# Altium PCB PowerBlock.PcbDoc
Units mm, origin at the board's own origin, x right, y up, seen from the top; angles counter-clockwise.
Board outline 35 x 25 mm, 2 copper layers (Top Layer, Bottom Layer); 19 components, 9 nets, 63 pads, 13 vias.
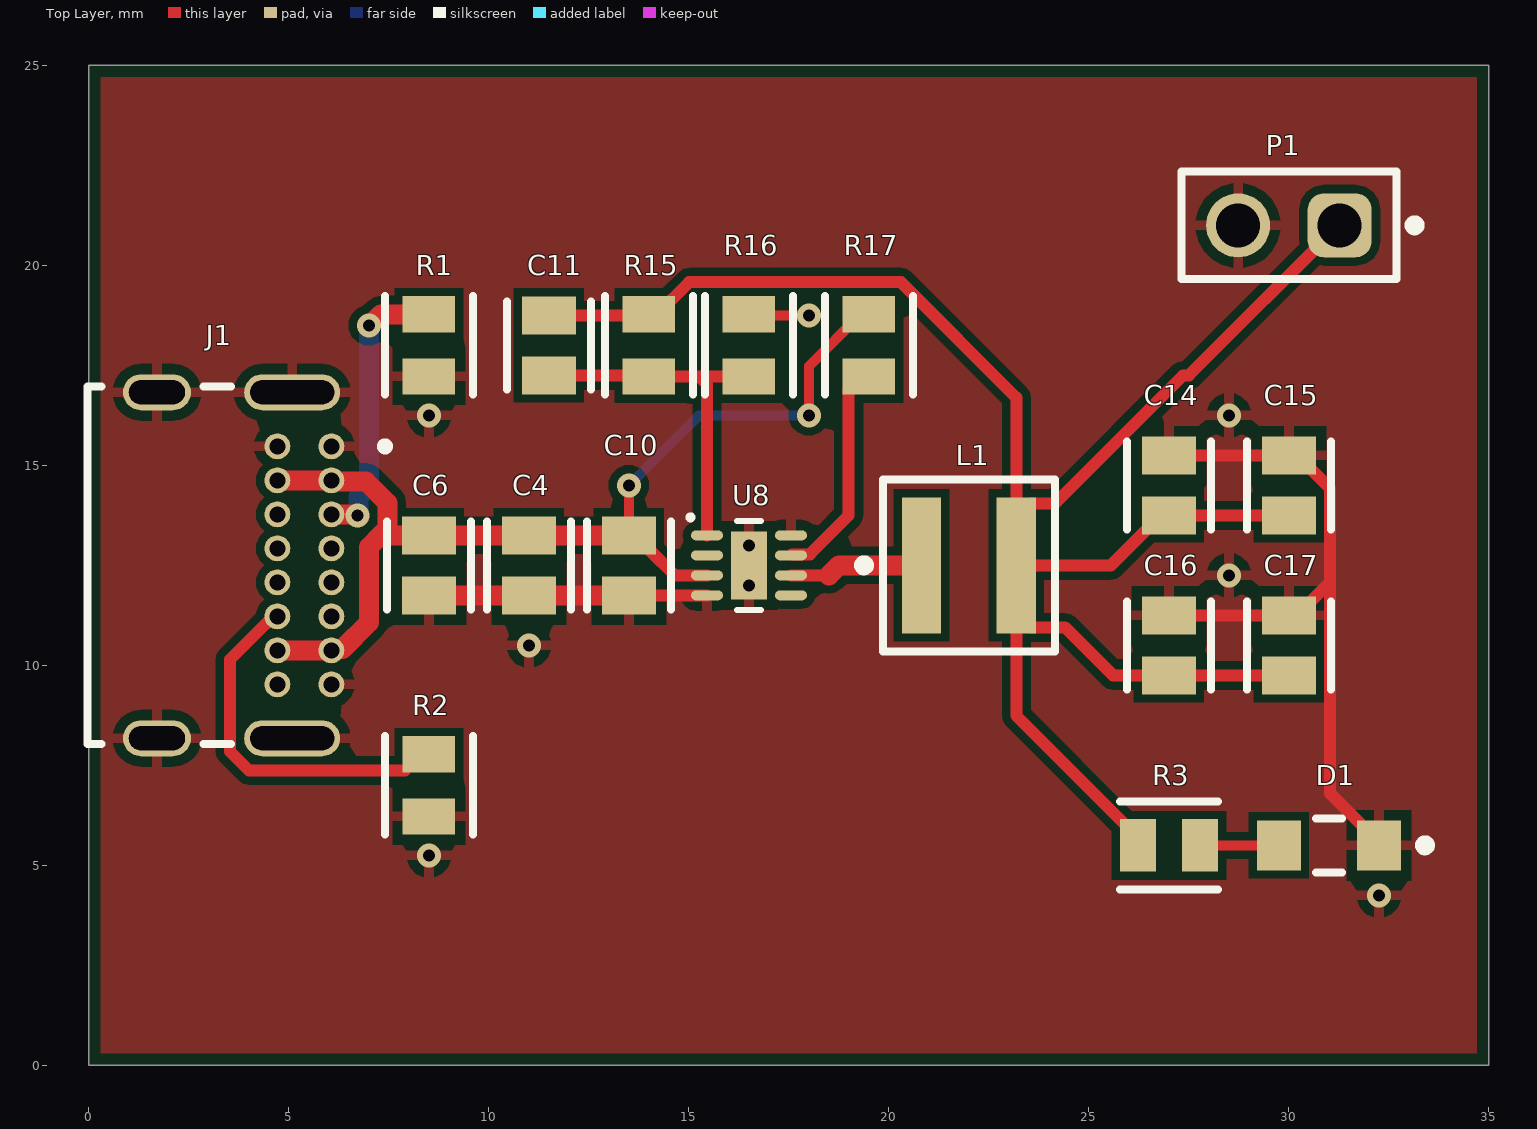
[diagram p0: Top Layer view]
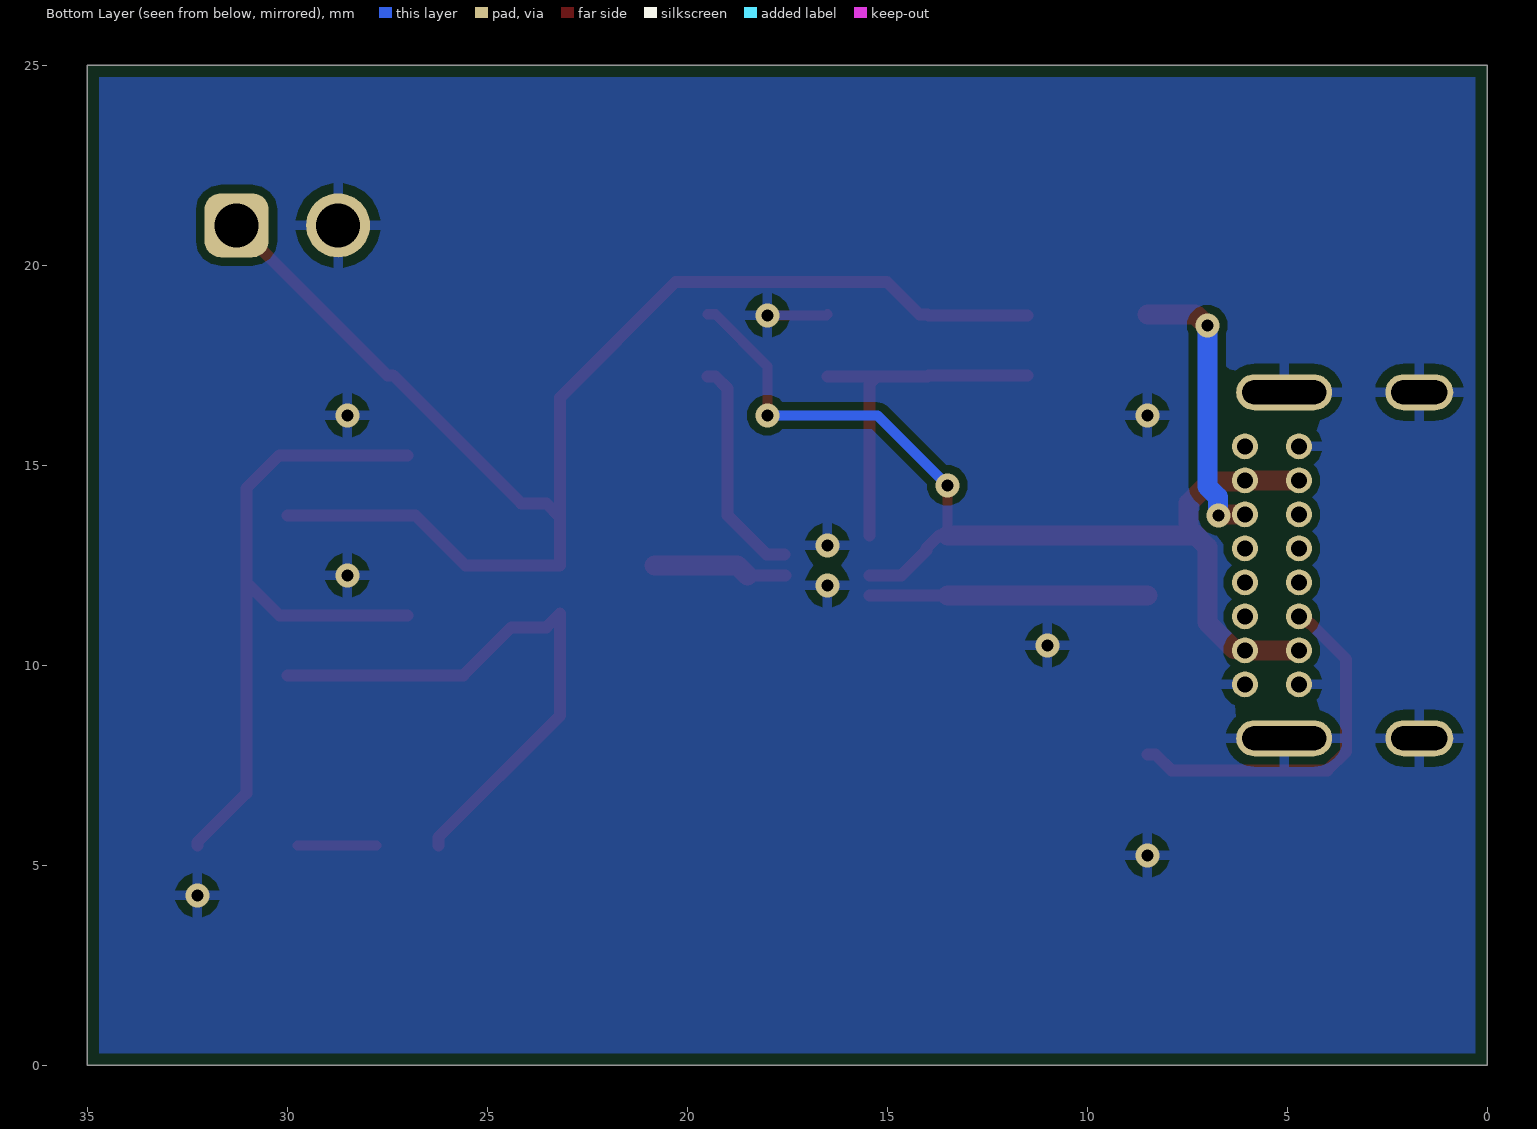
[diagram p1: Bottom Layer view, seen from below]
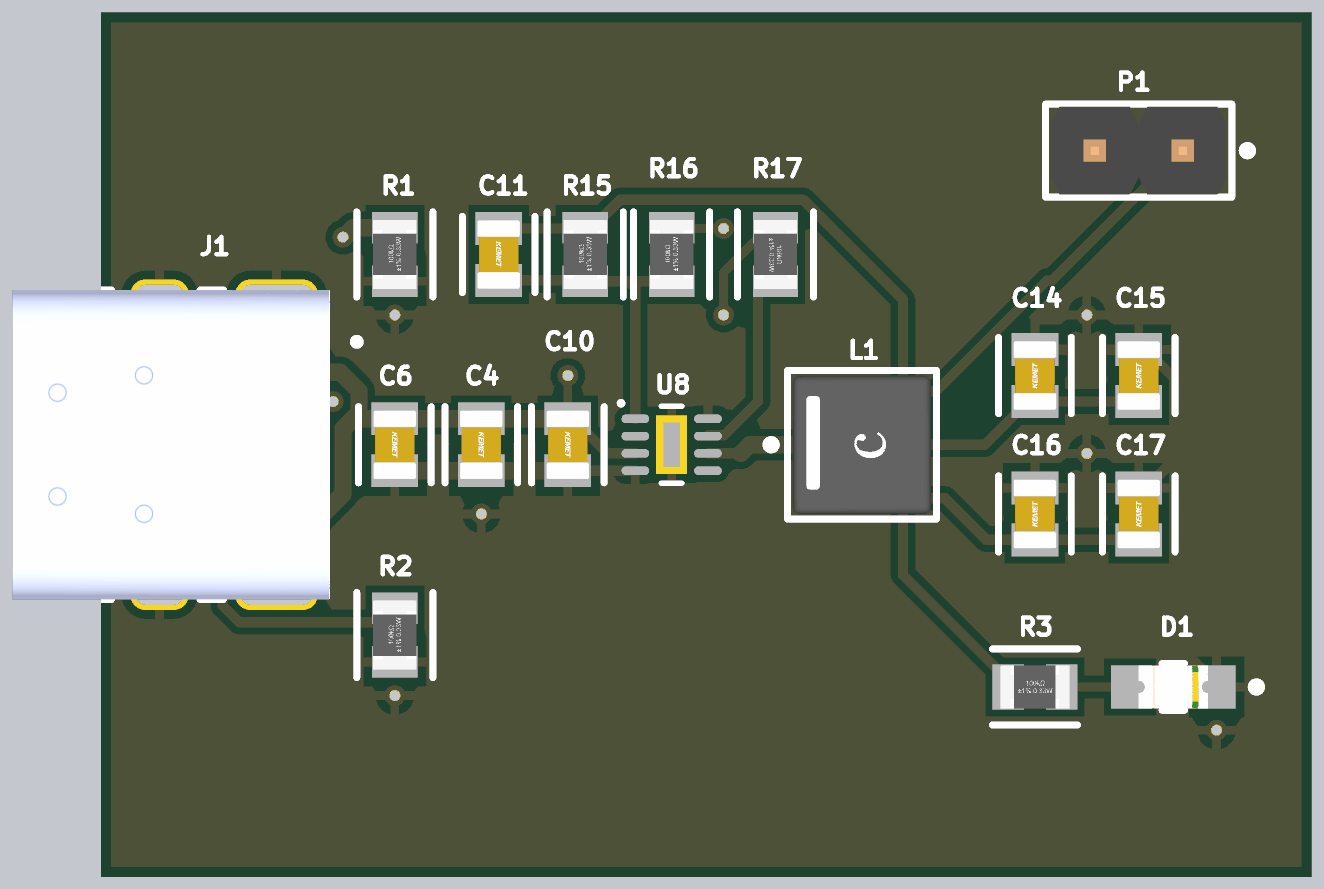
[diagram p2: 3D render of the assembled board from above, using the file's embedded part models]

## Layer stack, top to bottom
Top Solder: solder mask 0.0102, Solder Resist, Dk 3.5
Top Layer: signal copper 0.0356
Dielectric 1: dielectric 0.32, FR-4, Dk 4.8
Bottom Layer: signal copper 0.0356
Bottom Solder: solder mask 0.0102, Solder Resist, Dk 3.5

## Board outline
0,0 35,0 35,25 0,25

## Design rules (kind name [scope] priority, off if disabled: settings)
BoardOutlineClearance [All] p1: gap=0.254 ignorepadtopadclearanceinfootprint=FALSE except(0: Arc-SplitContinuation Track-OutlineEdge Track-CavityEdge Track-CutoutEdge Track-SplitBarrior Track-SplitContinuation SMDPad-SplitContinuation THPad-SplitContinuation Via-SplitContinuation Fill-SplitContinuation Poly-SplitContinuation Region-SplitContinuation Text-OutlineEdge Text-CavityEdge Text-CutoutEdge Text-SplitBarrior Text-SplitContinuation)
Clearance [All] p1: gap=0.2 ignorepadtopadclearanceinfootprint=FALSE
MinimumSolderMaskSliver [All] p1: minsoldermaskwidth=0.1
PolygonConnect [All] p1: connectstyle=Relief reliefconductorwidth=0.254 reliefentries=4 polygonreliefangle="90 Angle" airgapwidth=0.254
RoutingVias [All] p1: holewidth=0.3 width=0.6 viastyle="Through Hole" minholewidth=0.3 minwidth=0.6 maxholewidth=0.3 maxwidth=0.6
SilkToSilkClearance [All] p1: silktosilkclearance=0.15
SilkToSolderMaskClearance [IsPad] p1: minsilkscreentomaskgap=0.15 clearancetoexposedcopper=TRUE
SolderMaskExpansion [All] p1: expansion=0 istentingtop=FALSE
SupplyNets "Schematic Supply Nets_2" [InNet('3V3')] p1: voltage=0.000
SupplyNets "Schematic Supply Nets_1" [InNet('5V')] p2: voltage=0.000
SupplyNets "Schematic Supply Nets" [InNet('GND')] p3: voltage=0.000
Width [All] p1: maxlimit=2 minlimit=0.254 preferedwidth=0.3
27 further rules are at their usual default settings.

## Components (designator, comment, footprint, x,y, rotation, side; value= is the part's Value field where it differs from the comment)
C4 "10uF" FP-C0805C106K3PACTU-MFG 11,12.5 r270 top
C6 "10uF" FP-C0805C106K3PACTU-MFG 8.5,12.5 r270 top
C10 "100nF" FP-C0805C106K3PACTU-MFG 13.5,12.5 r270 top
C11 "470 pF" FP-C0805C106K3PACTU-MFG 11.5,18 r270 top
C14 "10uF" FP-C0805C106K3PACTU-MFG 27,14.5 r90 top
C15 "10uF" FP-C0805C106K3PACTU-MFG 30,14.5 r90 top
C16 "10uF" FP-C0805C106K3PACTU-MFG 27,10.5 r90 top
C17 "10uF" FP-C0805C106K3PACTU-MFG 30,10.5 r90 top
D1 "LED Green" FP-LTST-C171KGKT-MFG 31,5.5 r180 top
J1 "USB-C" GCT_USB4085-GF-A_REVA4 1.7,12.5 r270 top
L1 "2.2uH" FP-XAL4020-MFG 22,12.5 r0 top
P1 "61300211121" 61300211121 30,21 r180 top
R1 "5.1k" FP-CRGP0805-IPC_C 8.5,18 r90 top value=10KΩ
R2 "5.1k" FP-CRGP0805-IPC_C 8.5,7 r90 top value=10KΩ
R3 "330" FP-CRGP0805-IPC_C 27,5.5 r0 top value=10KΩ
R15 "10k" FP-CRGP0805-IPC_C 14,18 r90 top value=10KΩ
R16 "2.2k" FP-CRGP0805-IPC_C 16.5,18 r90 top value=10KΩ
R17 "100k" FP-CRGP0805-IPC_C 19.5,18 r270 top value=10KΩ
U8 "AP3441" SON50P201X201X60-9M 16.5,12.5 r0 top

## Footprints (in the part's own frame and the unit in brackets; to place one, negate y for a bottom-side part, rotate by r counter-clockwise, add the part's x,y. Pads: shape width x height; smd on the part's side, far side on the other; paste and mask are expansions set on the pad)
61300211121 [mm] "Pin Header, pitch 2.54 mm, THT, Vertical, single row, 2p"
  rrect50% 1.6x1.6 hole 1.1: 1(-1.27,0)
  round 1.6 hole 1.1: 2(1.27,0)
  silkscreen extent -3.26,-1.35 2.69,1.35, body extent -2.54,-1.27 2.54,1.27, height 8.57
FP-C0805C106K3PACTU-MFG [mm]
  rect 0.95x1.35 smd paste+0 mask+0: 1(-0.75,0) 2(0.75,0)
  silkscreen extent -1.1,-1.05 1.1,1.05, body extent -1.4,-0.85 1.4,0.85, height 0.25
FP-CRGP0805-IPC_C [mm]
  rect 0.906x1.31 smd paste+0 mask+0: 1(-0.776,0) 2(0.776,0)
  silkscreen extent -1.23,-1.1 1.23,1.1, body extent -1.33,-0.8 1.33,0.8, height 0.25
FP-LTST-C171KGKT-MFG [mm]
  rect 1.1x1.25 smd paste+0 mask+0: 1(-1.25,0) 2(1.25,0)
  silkscreen extent -2.53,-0.67 0.33,0.67, body extent -1.9,-0.77 1.9,0.77, height 0.25
FP-XAL4020-MFG [mm]
  rect 0.98x3.4 smd paste+0 mask+0: 1(-1.185,0) 2(1.185,0)
  silkscreen extent -2.75,-2.15 2.15,2.15, body extent -2.25,-2.25 2.25,2.25, height 0.25
GCT_USB4085-GF-A_REVA4 [mm]
  round 0.65 hole 0.4: A1(-2.975,4.36) A4(-2.125,4.36) A5(-1.275,4.36) A6(-0.425,4.36) A7(0.425,4.36) A8(1.275,4.36) A9(2.125,4.36) A12(2.975,4.36) B1(2.975,3.01) B4(2.125,3.01) B5(1.275,3.01) B6(0.425,3.01) B7(-0.425,3.01) B8(-1.275,3.01) B9(-2.125,3.01) B12(-2.975,3.01)
  oval 0.9x1.7 hole 0.6 slot 1.4 at 90 deg: S1(-4.325,0) S2(4.325,0)
  oval 0.9x2.4 hole 0.6 slot 2.1 at 90 deg: S3(-4.325,3.38) S4(4.325,3.38)
  silkscreen extent -4.47,-1.74 4.47,5.8, body extent -4.47,-4.25 4.47,4.92, height 3.46
SON50P201X201X60-9M [mm] "SON, 8-Leads, Body 2.01x2.01mm, Pitch 0.50mm, Thermal Pad 1.70x0.90mm, IPC Low Density"
  oval 0.8x0.25 smd: 1(-1.05,0.75) 2(-1.05,0.25) 3(-1.05,-0.25) 4(-1.05,-0.75) 5(1.05,-0.75) 6(1.05,-0.25) 7(1.05,0.25) 8(1.05,0.75)
  rect 0.9x1.7 smd paste-0.211: 9(0,0)
  silkscreen extent -1.52,-1.11 0.3,1.26, body extent -1.01,-1.01 1.01,1.01, height 0.6

## Part data
C4 C6 C14 C15 C16 C17: library part CMP-03020-034663-1, "CAP CER 10UF 25V X5R 0805", Case Code (Imperial)=0805, Case Code (Metric)=2012, Dielectric=X5R, Dielectric Material=Ceramic, Max Operating Temperature=85°C, Min Operating Temperature=-55°C, Tolerance=10%, Voltage=25V, Capacitance=10uF, Case/Package=0805, Depth=1.25mm, Dissipation Factor=10%, Height=1.25mm, Lead Free="Lead Free", Length=0.079inch, Mount="Surface Mount", Packaging="Cut Tape", REACH SVHC="No SVHC", RoHS Compliant=Yes, Termination=Solder, Thickness=0.057inch, Voltage Rating=25V, Voltage Rating (DC)=25V, Width=0.049inch
C10 C11: library part CMP-03020-034663-1, "CAP CER 10UF 25V X5R 0805", Capacitance=10uF, Case Code (Imperial)=0805, Case Code (Metric)=2012, Dielectric=X5R, Dielectric Material=Ceramic, Max Operating Temperature=85°C, Min Operating Temperature=-55°C, Tolerance=10%, Voltage=25V, Case/Package=0805, Depth=1.25mm, Dissipation Factor=10%, Height=1.25mm, Lead Free="Lead Free", Length=0.079inch, Mount="Surface Mount", Packaging="Cut Tape", REACH SVHC="No SVHC", RoHS Compliant=Yes, Termination=Solder, Thickness=0.057inch, Voltage Rating=25V, Voltage Rating (DC)=25V, Width=0.049inch
D1: library part CMP-22017-000037-1, "LED GREEN CLEAR SMD", Case Code (Imperial)=0805, Case Code (Metric)=2012, Color=Green, Forward Current=30mA, Forward Voltage=2.4V, Lens Color=Colorless, Max Operating Temperature=85°C, Min Operating Temperature=-55°C, Package Quantity=1, Power Dissipation=75mW, Reverse Voltage=5V, Test Current=20mA, Case/Package=0805, Depth=1.25mm, Dominant Wavelength=571nm, Height=0.8mm, Illumination Color=Green, Lead Free="Lead Free", Length=2mm, Lens Style=Rectangular, Lens Transparency=Clear, Luminous Intensity=35mcd, Mount="Surface Mount", Number of Elements=1, Number of LEDs=1, Number of Pins=2, Packaging="Tape and Reel", Power Rating=75mW, Radiation Hardening=No, Viewing Angle=130°, Wavelength=574nm, Width=1.25mm
J1: library part USB4085-GF-A_REVA4, "USB-C (USB TYPE-C) USB 2.0 Receptacle Connector 24 (16+8 Dummy) Position Through Hole, Right Angle, low cost, 3.46mm profile, 16 pin, horizontal, Top mount", Package=None, Availability="In Stock", Check_prices=https://www.snapeda.com/parts/USB4085-GF-A/Global+Connector+Technology/view-part/?ref=eda, MF="Global Connector Technology", MP=USB4085-GF-A, Price=None, Purchase-URL=https://pricing.snapeda.com/search/part/USB4085-GF-A/?ref=eda, SnapEDA_Link=https://www.snapeda.com/parts/USB4085-GF-A/Global+Connector+Technology/view-part/?ref=snap
L1: library part CMP-11268-000134-1, "Fixed Inductors 2.2uH Shld 20% 5.5A 38.7mOhms AECQ2", Case/Package=SMD/SMT, DC Resistance (DCR)=38.7mR, Inductance Tolerance=20%, Max DC Current=5.5A, Max Operating Temperature=125°C, Min Operating Temperature=-40°C, Package Quantity=1000, Saturation Current=5.6A, Self Resonant Frequency=52MHz, Test Frequency=100kHz, Core Material=Composite, Height=2.1mm, Inductance=2.2uH, Lead Free="Contains Lead", Length=4.3mm, Mount="Surface Mount", Packaging="Tape and Reel", RMS Current (Irms)=5.5A, RoHS Compliant=Yes, Series=XAL4020, Shielding=Shielded, Termination=SMD/SMT, Tolerance=20%, Width=4.3mm
P1: library part CMP-1712-00002-7, "THT Vertical Pin Header WR-PHD, Pitch 2.54 mm, Single Row, 2 pins", Color=Black, Contact Resistance=20mΩ, Current Rating=3A, Max Operating Temperature=105°C, Min Operating Temperature=-40°C, Operating Supply Voltage=250V, Connector Type="Male Pin", Contact Gender=Male, Contact Material=Gold, Contact Mating Length=5.9944mm, Contact Plating=Gold, Gender=Male, Height=8.94mm, Housing Material=PBT, Lead Free="Lead Free", Lead Pitch=2.54mm, Mount="Through Hole", Number of Contacts=2, Number of Pins=2, Number of Positions=2, Number of Rows=1, Orientation=Vertical, Packaging=Bulk, Pitch=2.54mm, REACH SVHC=No, RoHS=Compliant, Termination="Through Hole", Voltage Rating=250V
R1 R2 R3 R15 R16 R17: library part CMP-03211-006861-1, "CRGP 0805 10K 1%", Ambient Temperature Range High=+70°C, Manufacturer=TE, Manufacturer Part Number=CRGP0805F10K, Package=CRGP0805, Power Rating=0.33W, Resistance=10KΩ, Temperature="-55°C to +155°C", Temperature Coefficient=±100ppm/°C, Temperature Range High=+155°C, Temperature Range Low=-55°C, Tolerance=0.01, Voltage Rating=150V, Automotive=No, Category=Res, ComponentLink2Description=Datasheet, ComponentLink2URL=https://www.mouser.com/datasheet/2/418/NG_DS_9-1773463-9_A-1358566.pdf, Composition="Thick Film", Device Class L1="Passive Components", Device Class L2=Resistors, Device Class L3="Chip SMD Resistors", Digikey Description="CRGP 0805 10K 1%", Height=0.65mm, Ipc Land Pattern Name=RESC200125X55, Lead Free=Yes, Octopart=https://octopart.com/crgp0805f10k-te+connectivity-91018782, RoHS=TRUE, Series=CRGP
U8: library part AP3441LSHE-7B, "DC-DC Switching Buck Regulator, Adjustable, 2.7 to 5.5 V in, 0.6 to 5.5 V/3 A, U-DFN2020-8", Ambient Temperature Range High=85°C, Manufacturer="Diodes Inc.", Manufacturer Package Identifier="U-DFN2020-8 (Type E)", Max Junction Temperature (Tj)=125°C, Max Output Voltage=5.5V, Max Power Dissipation=1.4W, Max Switching Frequency=1.2MHz, Min Input Voltage=2.7V, Min Operating Temperature=-40°C, Min Output Voltage=600mV, Nominal Output Voltage=2.5V, Nominal Supply Current=55µA, Nominal Supply Voltage=5V, Output Current=3A, Switching Frequency=1MHz, Category="Voltage Regulators - Switching", China RoHS=Compliant, ComponentLink1Description=https://datasheet.octopart.com:443/AP3441LSHE-7B-Diodes-Inc.-datasheet-151209809.pdf?src-supplier=IHS, ComponentLink1URL=https://datasheet.octopart.com:443/AP3441LSHE-7B-Diodes-Inc.-datasheet-151209809.pdf?src-supplier=IHS, ComponentLink2Description=https://sigma.octopart.com:443/151209808/technical_drawing/Diodes-Inc.-AP3441LSHE-7B.pdf?src-supplier=Upverter, ComponentLink2URL=https://sigma.octopart.com:443/151209808/technical_drawing/Diodes-Inc.-AP3441LSHE-7B.pdf?src-supplier=Upverter, Height=600µm, Height - Seated (Max)=600µm, Length=2mm, Lifecycle Status=Production, Manufacturer Part Number=AP3441LSHE-7B, Max Duty Cycle=100%, Max Operating Temperature=85°C, Max Supply Voltage=5.5V, Min Supply Voltage=2.7V, Nominal Supply Voltage (DC)=5V, Number of Circuits=1, Number of Outputs=1, Number of Terminals=8, Pricing="5=0.314, 15=0.217, 25=0.193 (USD)", REACH SVHC=Yes, RoHS=Compliant, Supplier=Newark, Supplier Part Number=AP3441LSHE-7B, Terminal Pitch=500µm, Topology=Buck, Width=2mm

## Via types
v1: diameter 0.6, hole 0.3, Top Layer to Bottom Layer, tented both sides, 13 vias

## Nets (pads, with @x,y where several pads share a name; then routed paths per layer and width w, separated by ;. In a path a pad name is that pad's centre, name@x,y a point inside that pad or via, vN(x,y) a via of type N, cw(c..) or ccw(c..) an arc to the next point about the centre after c; other vN are vias at no path point)
3V3: C11.1 C14.1 C15.1 C16.1 C17.1 L1.2 P1.1 R3.1 R15.2 | length 51.6
  Top Layer w0.3: C11.1 13.974,18.75 R15.2 14.202,18.776 15.005,19.579 20.3,19.579 23.185,16.694 L1.2 ; R3.1 26.224,5.702 23.185,8.741 23.185,11.29 23.525,10.95 24.4,10.95 25.6,9.75 C16.1 C17.1 ; C15.1 C14.1 26.8,13.75 25.55,12.5 L1.2 ; P1.1 31.25,21 27.498,17.248 27.353,17.248 24.155,14.05 23.525,14.05 23.185,13.71 L1.2
5V: C4.1 C6.1 C10.1 J1.A4 J1.A9 J1.B4 J1.B9 R17.1 U8.3 | length 26.9
  Top Layer w0.254: C10.1 v1(13.5,14.5) ; v1(18,16.25) 18,17.478 19.298,18.776 R17.1
  Top Layer w0.3: C10.1@13.7,13.25 14.025,12.925 14.025,12.87 14.645,12.25 U8.3
  Top Layer w0.5: J1.B4 J1.A9 6.089,10.404 6.335,10.404 7,11.069 7,12.957 7.293,13.25 ; J1.B9 J1.A4 6.089,14.596 6.928,14.596 7.466,14.059 7.466,13.423 7.293,13.25 ; C10.1 C4.1 C6.1 7.293,13.25
  Bottom Layer w0.254: v1(13.5,14.5) 15.25,16.25 v1(18,16.25)
GND: C4.2 C6.2 C10.2 C14.2 C15.2 C16.2 C17.2 D1.1 J1.A1 J1.A12 J1.B1 J1.B12 J1.S1 J1.S2 J1.S3 J1.S4 P1.2 R1.1 R2.1 R16.2 U8.4 U8.8 U8.9 | length 26.6
  Top Layer w0.254: R16.2 16.526,18.75 v1(18,18.75)
  Top Layer w0.3: C10.2 U8.4 ; C16.2 C17.2 30.2,11.25 31.025,12.075 ; C14.2 C15.2 30.2,15.25 31.025,14.425 31.025,6.8 32.25,5.575 D1.1
  Top Layer w0.5: C6.2 C4.2 C10.2
  other v1: 32.25,4.25 8.5,5.25 11,10.5 16.5,12 28.5,12.25 16.5,13 8.5,16.25 28.5,16.25
NetC11_2: C11.2 R15.1 R16.1 U8.1 | length 9.1
  Top Layer w0.3: C11.2 13.974,17.25 R15.1 15.25,17.224 ; U8.1 15.45,17.024 15.25,17.224 ; R16.1 15.25,17.224
NetD1_2: D1.2 R3.2 | length 2
  Top Layer w0.254: R3.2 D1.2
NetJ1_A5: J1.A5 R1.2 | length 7.2
  Top Layer w0.5: J1.A5 6.689,13.775 v1(6.716,13.748) ; v1(7,18.5) 7.027,18.5 7.303,18.776 R1.2
  Bottom Layer w0.5: v1(6.716,13.748) 6.735,13.767 6.735,14.204 7,14.469 v1(7,18.5)
NetJ1_B5: J1.B5 R2.2 | length 9.3
  Top Layer w0.3: J1.B5 4.615,11.225 4.44,11.05 4.43,11.05 3.53,10.15 3.53,7.844 3.999,7.375 7.897,7.375 8.298,7.776 R2.2
NetL1_1: L1.1 U8.6 | length 3.4
  Top Layer w0.3: U8.6 18.5,12.25
  Top Layer w0.5: 18.5,12.25 18.75,12.5 L1.1
NetR17_2: R17.2 U8.7 | length 5.6
  Top Layer w0.3: U8.7@17.575,12.775 18.022,12.775 18.995,13.748 18.995,16.921 19.298,17.224 R17.2
pads on no net: J1.A6 J1.A7 J1.A8 J1.B6 J1.B7 J1.B8 U8.2 U8.5

## Polygon pours and split planes (outlines as drawn)
GND on Top Layer "GND_L01_P000" (solid, remove dead copper, pour order 0): 0.3,0.3 34.7,0.3 34.7,24.7 0.3,24.7
GND on Bottom Layer "GND_L02_P001" (solid, remove dead copper, pour order 1): 0.3,0.3 34.7,0.3 34.7,24.7 0.3,24.7

## Silkscreen, mask and mechanical layers (free items; w line width, h text height)
Mechanical 1:
  the board outline again, w1.2

## Text inside footprints (layer, text, board x,y; h text height)
J1: Top 3D Body "PCB EDGE" at 0.13,7.185 h0.81 r270